# Altium PCB pcb_furnace.pcbdoc
Units mil, origin at the board's own origin, x right, y up, seen from the top; angles counter-clockwise.
Board outline 5155 x 3594.85 mil, 2 copper layers (Top Layer, Bottom Layer); 38 components, 44 nets, 187 pads, 409 vias.
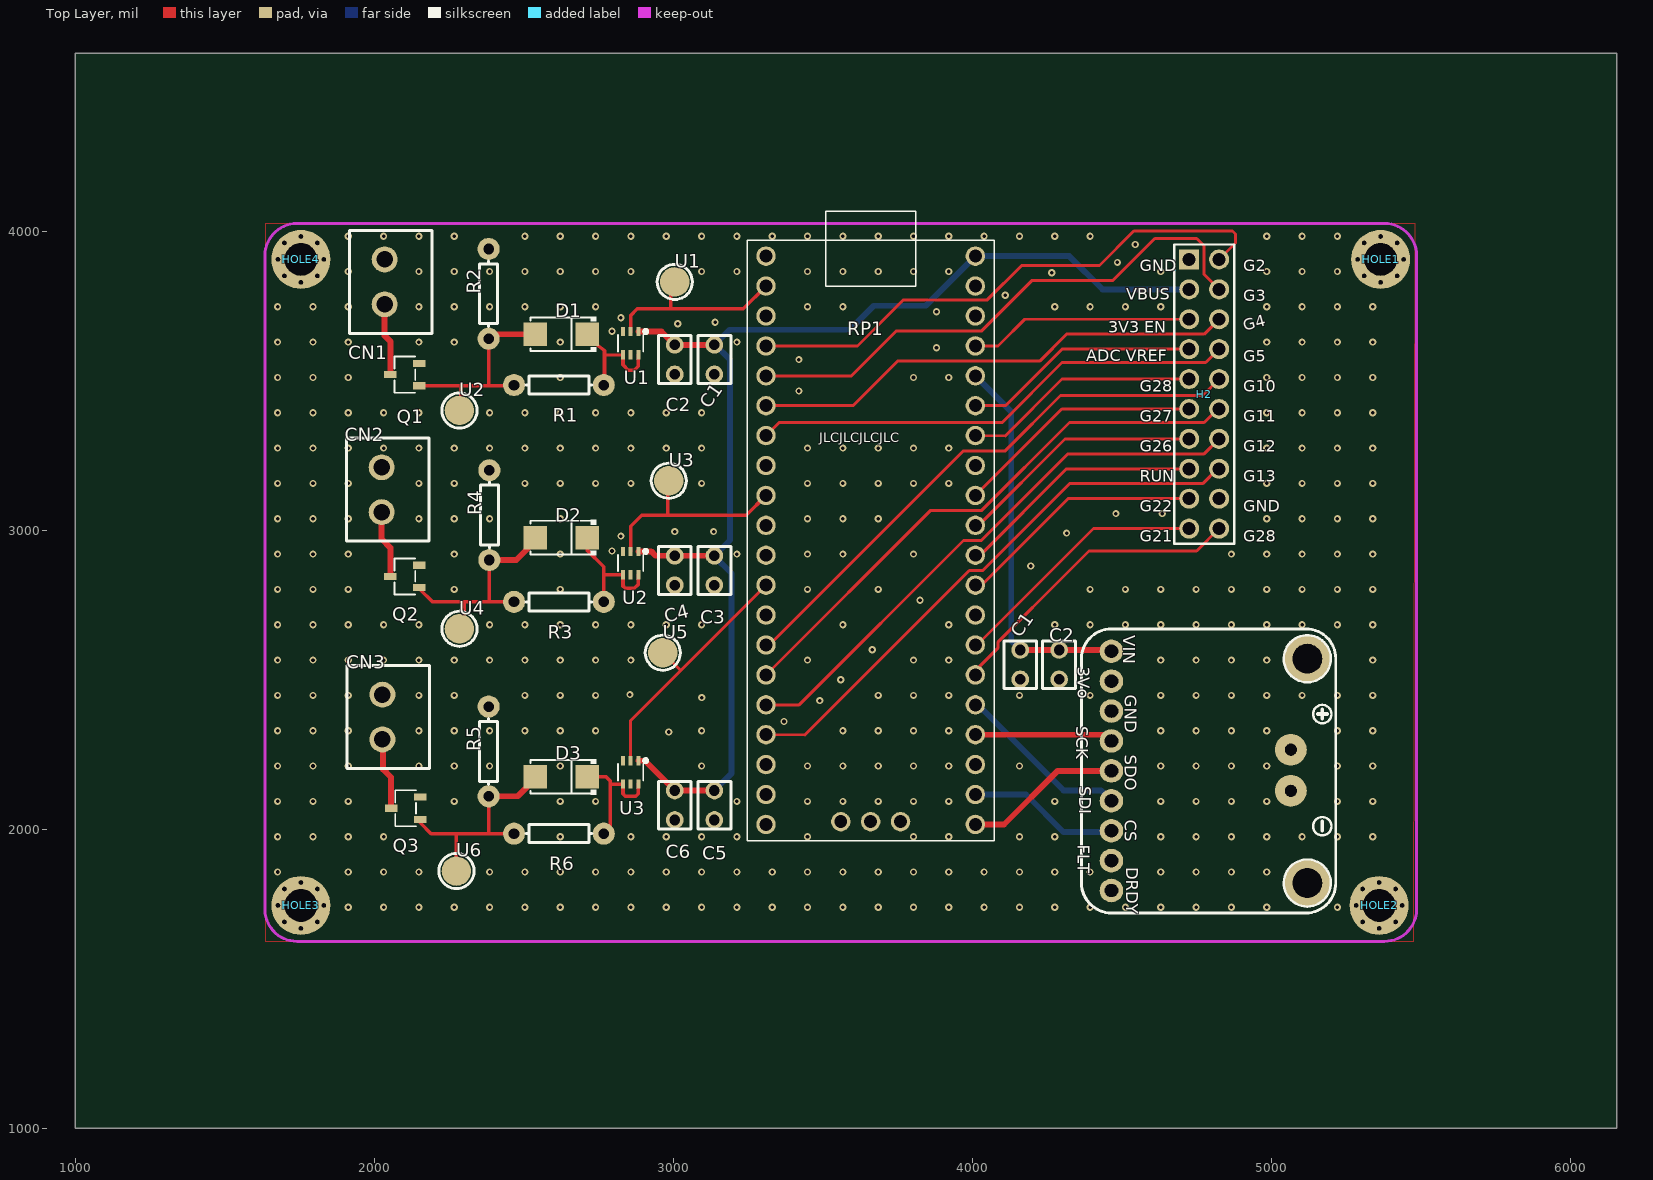
[diagram p0: Top Layer view]
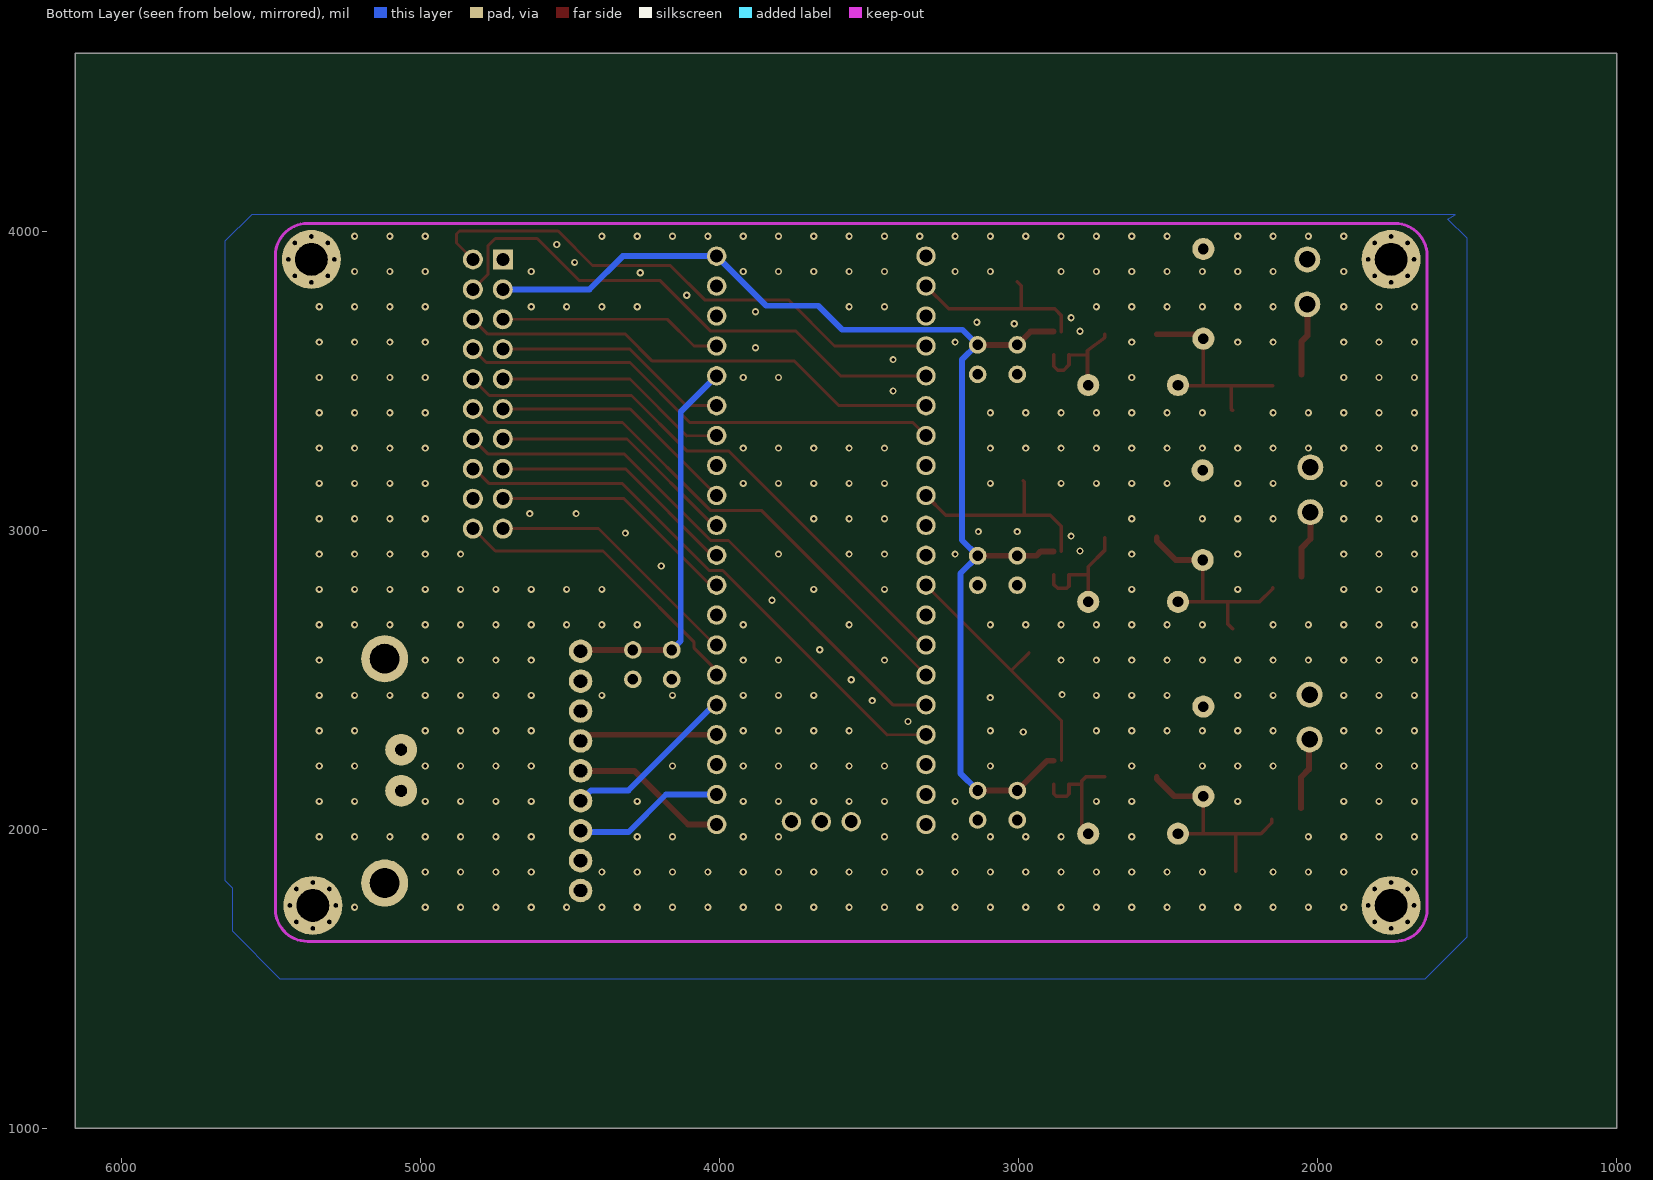
[diagram p1: Bottom Layer view, seen from below]

## Layer stack, top to bottom
Top Layer: signal copper (thickness not stored)
Dielectric: dielectric 12.6, FR-4, Dk 4.8
Bottom Layer: signal copper (thickness not stored)

## Board outline
6155,1000 1000,1000 1000,4594.85 6155,4594.85

## Components (designator, comment, footprint, x,y, rotation, side; value= is the part's Value field where it differs from the comment)
C1 "100n" CAP-TH_L3.6-W2.3-P2.5-D0.6 4160,2550 r90 top
C1 "10u" CAP-TH_L3.6-W2.3-P2.5-D0.6 3137.5,3570 r90 top
C2 "10u" CAP-TH_L3.6-W2.3-P2.5-D0.6 4290,2550 r90 top
C2 "100n" CAP-TH_L3.6-W2.3-P2.5-D0.6 3005,3570 r90 top
C3 "10u" CAP-TH_L3.6-W2.3-P2.5-D0.6 3137.5,2865 r90 top
C4 "100n" CAP-TH_L3.6-W2.3-P2.5-D0.6 3005,2865 r90 top
C5 "10u" CAP-TH_L3.6-W2.3-P2.5-D0.6 3137.5,2080 r90 top
C6 "100n" CAP-TH_L3.6-W2.3-P2.5-D0.6 3005,2080 r90 top
CN1 "XY2500V-E-3.81-2P" CONN-TH_XY2500V-E-3.81-2P 2035,3830 r270 top
CN2 "XY2500V-E-3.81-2P" CONN-TH_XY2500V-E-3.81-2P 2025,3135 r270 top
CN3 "XY2500V-E-3.81-2P" CONN-TH_XY2500V-E-3.81-2P 2027.5,2375 r270 top
D1 "SS14_C2891710" SMA_L4.3-W2.6-LS5.2-RD 2625,3655 r180 top
D2 "SS14_C2891710" SMA_L4.3-W2.6-LS5.2-RD 2625,2975 r180 top
D3 "SS14_C2891710" SMA_L4.3-W2.6-LS5.2-RD 2625,2175 r180 top
H2 "HDR-TH_20P-P2.54-V-M-R2-C10-S2.54" HDR-TH_20P-P2.54-V-M-R2-C10-S2.54 4775,3455 r270 top
HOLE1 "M2.5-HOLE" M2.5-HOLE 5365,3905 r0 top
HOLE2 "M2.5-HOLE" M2.5-HOLE 5360,1745 r0 top
HOLE3 "M2.5-HOLE" M2.5-HOLE 1755,1745 r0 top
HOLE4 "M2.5-HOLE" M2.5-HOLE 1755,3905 r0 top
Q1 "AO3400-SOT23-3L" SOT-23-3_L2.9-W1.6-P1.90-LS2.8-BR 2102.5,3520 r0 top
Q2 "AO3400-SOT23-3L" SOT-23-3_L2.9-W1.6-P1.90-LS2.8-BR 2102.5,2845 r0 top
Q3 "AO3400-SOT23-3L" SOT-23-3_L2.9-W1.6-P1.90-LS2.8-BR 2105,2070 r0 top
R1 "1k" R_AXIAL-0.3 2617.5,3485 r0 top
R2 "1k" R_AXIAL-0.3 2382.5,3790 r90 top
R3 "1k" R_AXIAL-0.3 2617.5,2760 r0 top
R4 "1k" R_AXIAL-0.3 2385,3050 r90 top
R5 "1k" R_AXIAL-0.3 2382.5,2260 r90 top
R6 "1k" R_AXIAL-0.3 2617.5,1985 r0 top
RP1 "RASPBERRY-PI-PICO-THT" RASPBERRY-PI-PICO-THT 3660,2925 r0 top
U1 "ZXGD3009DYTA" SOT-363_L2.0-W1.3-P0.65-LS2.1-BL 2857.5,3625 r180 top
U1 "ZXS-0062A2" TESTPOINT-SMD_ZXS-0062A2 3005,3830 r0 top
U2 "ZXGD3009DYTA" SOT-363_L2.0-W1.3-P0.65-LS2.1-BL 2857.5,2890 r180 top
U2 "ZXS-0062A2" TESTPOINT-SMD_ZXS-0062A2 2285,3400 r0 top
U3 "ZXGD3009DYTA" SOT-363_L2.0-W1.3-P0.65-LS2.1-BL 2857.5,2190 r180 top
U3 "ZXS-0062A2" TESTPOINT-SMD_ZXS-0062A2 2985,3165 r0 top
U4 "ZXS-0062A2" TESTPOINT-SMD_ZXS-0062A2 2285,2670 r0 top
U5 "ZXS-0062A2" TESTPOINT-SMD_ZXS-0062A2 2965,2590 r0 top
U6 "ZXS-0062A2" TESTPOINT-SMD_ZXS-0062A2 2275,1860 r0 top

## Footprints (in the part's own frame and the unit in brackets; to place one, negate y for a bottom-side part, rotate by r counter-clockwise, add the part's x,y. Pads: shape width x height; smd on the part's side, far side on the other; paste and mask are expansions set on the pad)
CAP-TH_L3.6-W2.3-P2.5-D0.6 [mm]
  round 1.5 hole 0.9 paste+0 mask+0.05: 1(-1.25,0) 2(1.25,0)
  silkscreen extent -2.03,-1.4 2.03,1.4
CONN-TH_XY2500V-E-3.81-2P [mm]
  round 2.2 hole 1.4 paste+0 mask+0.051: 1(-1.905,0) 2(1.905,0)
  silkscreen extent -4.37,-3 4.38,4
HDR-TH_20P-P2.54-V-M-R2-C10-S2.54 [mm]
  rect 1.7x1.7 hole 1.1 paste+0 mask+0.051: 1(-11.43,-1.27)
  round 1.7 hole 1.1 paste+0 mask+0.051: 2(-11.43,1.27) 3(-8.89,-1.27) 4(-8.89,1.27) 5(-6.35,-1.27) 6(-6.35,1.27) 7(-3.81,-1.27) 8(-3.81,1.27) 9(-1.27,-1.27) 10(-1.27,1.27) 11(1.27,-1.27) 12(1.27,1.27) 13(3.81,-1.27) 14(3.81,1.27) 15(6.35,-1.27) 16(6.35,1.27) 17(8.89,-1.27) 18(8.89,1.27) 19(11.43,-1.27) 20(11.43,1.27)
  silkscreen extent -12.7,-2.54 12.7,2.54
M2.5-HOLE [mm]
  round 5 hole 2.75 paste+0 mask+0.051: P$1(0,0)
  round 0.655 hole 0.35 slot 0.355 at 0 deg unplated paste+0 mask+0.051: P$2(0,1.95) P$3(0,-1.95) P$4(-1.95,0) P$5(1.95,0) P$6(1.4,1.4) P$7(-1.4,1.4) P$8(-1.4,-1.4) P$9(1.4,-1.4)
R_AXIAL-0.3 [mil]
  round 74 hole 35.4 paste+0 mask+2: 1(-150,0) 2(150,0)
  silkscreen extent -110,-30 110,30
RASPBERRY-PI-PICO-THT [mm]
  round 1.65 hole 1.1 paste+0 mask+0.051: 3V3(OUT)(8.89,15.01) 3V3_EN(8.89,17.55) ADC_VREF(8.89,12.47) GND(-8.89,20.09) GND1(-8.89,7.39) GND2(-8.89,-5.31) GND3(-8.89,-18.01) GND4(8.89,20.09) GND5(8.89,7.39) GND6(8.89,-5.31) GND7(8.89,-18.01) GND8(0,-22.86) GP0(-8.89,25.17) GP1(-8.89,22.63) GP2(-8.89,17.55) GP3(-8.89,15.01) GP4(-8.89,12.47) GP5(-8.89,9.93) GP6(-8.89,4.85) GP7(-8.89,2.31) GP8(-8.89,-0.23) GP9(-8.89,-2.77) GP10(-8.89,-7.85) GP11(-8.89,-10.39) GP12(-8.89,-12.93) GP13(-8.89,-15.47) GP14(-8.89,-20.55) GP15(-8.89,-23.09) GP16(8.89,-23.09) GP17(8.89,-20.55) GP18(8.89,-15.47) GP19(8.89,-12.93) GP20(8.89,-10.39) GP21(8.89,-7.85) GP22(8.89,-2.77) GP26(8.89,2.31) GP27(8.89,4.85) GP28(8.89,9.93) RUN(8.89,-0.23) SWCLK(-2.54,-22.86) SWDIO(2.54,-22.86) VBUS(8.89,25.17) VSYS(8.89,22.63)
  silkscreen extent -10.5,-24.46 10.5,28.98
SMA_L4.3-W2.6-LS5.2-RD [mm]
  rect 2x2 smd paste+0 mask+0.051: 1(-2.2,0) 2(2.2,0)
  silkscreen extent -2.98,-1.5 2.6,1.5
SOT-23-3_L2.9-W1.6-P1.90-LS2.8-BR [mm]
  rect 1.07x0.6 smd paste+0 mask+0.051: 1(1.235,-0.95) 2(1.235,0.95) 3(-1.235,0)
  silkscreen extent -0.88,-1.54 0.88,1.54
SOT-363_L2.0-W1.3-P0.65-LS2.1-BL [mm]
  rect 0.35x0.78 smd paste+0 mask+0.051: 1(-0.65,-0.99) 2(0,-0.99) 3(0.65,-0.99) 4(0.65,0.99) 5(0,0.99) 6(-0.65,0.99)
  silkscreen extent -1.43,-1.14 1.08,0.7
TESTPOINT-SMD_ZXS-0062A2 [mm]
  round 2.5 smd paste+0 mask+0.05: 1(0,0)
  silkscreen extent -1.49,-1.49 1.49,1.49

## Free pads (board coordinates)
  round 78.74 hole 43.31 slot 45.47 at 0 deg paste+0 mask+4: 1(4465,2595) 2(4465,2495) 3(4465,2395) 4(4465,2295) 5(4465,2195) 6(4465,2095) 7(4465,1995) 8(4465,1895) 9(4465,1795)
  round 106.3 hole 39.36 paste+0 mask+4: 10(5065,2265.87) 11(5065,2128.07)
  round 157.48 hole 98.42 slot 98.62 at 90 deg paste+0 mask+4: P$1(5120,1820) P$1(5120,2570)
  round 98.43 hole 98.43 unplated paste+0: ""(5120,1820) ""(5120,2570)

## Via types
v1: diameter 24.02, hole 12.01, Top Layer to Bottom Layer, tented both sides, 400 vias
v2: diameter 24.41, hole 12.2, Top Layer to Bottom Layer, tented both sides, 9 vias

## Nets (pads, with @x,y where several pads share a name; then routed paths per layer and width w, separated by ;. In a path a pad name is that pad's centre, name@x,y a point inside that pad or via, vN(x,y) a via of type N, cw(c..) or ccw(c..) an arc to the next point about the centre after c; other vN are vias at no path point)
CN4_1: CN2.2 Q2.3 | length 227
  Top Layer w19.68: CN2.2 2025,2970 2053.9,2941.1 Q2.3
CN6_1: CN3.2 Q3.3 | length 242
  Top Layer w19.68: CN3.2 2030,2297.5 2030,2200 2056.38,2173.62 Q3.3
D2_1: D2.1 R3.2 U2.4 U2.6 | length 433.3
  Top Layer w11.81: D2.1 2711.6,2933.4 2767.5,2877.5 R3.2 ; 2767.5,2851 U2.4 2831.9,2813.1 2840,2805 2870,2805 2883.1,2818.1 U2.6
D2_2: D2.2 Q2.1 R3.1 R4.1 U4.1 | length 779
  Top Layer w11.81: Q2.1 2151.1,2803.9 2195,2760 R3.1 ; U4.1 2301.88,2686.88 2301.88,2760 ; 2385,2760 R4.1
  Top Layer w19.68: R4.1 2475,2900 2538.4,2963.4 D2.2 ; R3.1@2455,2760 R3.1
D3_1: D3.1 R6.2 U3.4 U3.6 | length 434.5
  Top Layer w11.81: D3.1 2775,2175 2790,2160 2790,2151 ; R6.2 2790,2007.5 2790,2151 ; U3.6 2883.1,2118.1 2875,2110 2840,2110 2831.9,2118.1 U3.4 2790,2151
D3_2: D3.2 Q3.1 R5.1 R6.1 U6.1 | length 776.9
  Top Layer w11.81: Q3.1 2153.6,2021.4 2190,1985 R6.1 ; U6.1 2275.1,1985 ; 2382.5,1985 R5.1
  Top Layer w19.68: R5.1 2480,2110 2538.4,2168.4 D3.2
GND: C1.1 C2.1 C3.1 C4.1 C5.1 C6.1 CN1.1 CN2.1 CN3.1 H2.1 H2.18 pad.3 Q1.2 Q2.2 Q3.2 R2.2 R4.2 R5.2 RP1.GND RP1.GND1 RP1.GND2 RP1.GND3 RP1.GND4 RP1.GND5 RP1.GND6 RP1.GND7 U1.3 U2.3 U3.3
  other v1: 1913.43,1738.7 2031.54,1738.7 2149.65,1738.7 2267.76,1738.7 2385.87,1738.7 2503.98,1738.7 2622.09,1738.7 2740.2,1738.7 2858.31,1738.7 2976.42,1738.7 3094.53,1738.7 3212.64,1738.7 3330.75,1738.7 3448.86,1738.7 3566.97,1738.7 3685.08,1738.7 3803.19,1738.7 3921.3,1738.7 4039.41,1738.7 4157.52,1738.7 4275.63,1738.7 4393.74,1738.7 4511.85,1738.7 4629.96,1738.7 4748.07,1738.7 4866.18,1738.7 4984.29,1738.7 5220.51,1738.7 1677.21,1856.81 1913.43,1856.81 2031.54,1856.81 2149.65,1856.81 2385.87,1856.81 2503.98,1856.81 2622.09,1856.81 2740.2,1856.81 2858.31,1856.81 2976.42,1856.81 3094.53,1856.81 3212.64,1856.81 3330.75,1856.81 3448.86,1856.81 3566.97,1856.81 3685.08,1856.81 3803.19,1856.81 3921.3,1856.81 4039.41,1856.81 4157.52,1856.81 4275.63,1856.81 4393.74,1856.81 4629.96,1856.81 4748.07,1856.81 4866.18,1856.81 4984.29,1856.81 1677.21,1974.92 1795.32,1974.92 1913.43,1974.92 2031.54,1974.92 2622.09,1974.92 2858.31,1974.92 2976.42,1974.92 3094.53,1974.92 3212.64,1974.92 3448.86,1974.92 3803.19,1974.92 3921.3,1974.92 4157.52,1974.92 4275.63,1974.92 4629.96,1974.92 4748.07,1974.92 4866.18,1974.92 4984.29,1974.92 5102.4,1974.92 5220.51,1974.92 5338.62,1974.92 1677.21,2093.03 1795.32,2093.03 1913.43,2093.03 2267.76,2093.03 2622.09,2093.03 2740.2,2093.03 3212.64,2093.03 3448.86,2093.03 3566.97,2093.03 3685.08,2093.03 3803.19,2093.03 3921.3,2093.03 4275.63,2093.03 4629.96,2093.03 4748.07,2093.03 4866.18,2093.03 4984.29,2093.03 5220.51,2093.03 5338.62,2093.03 1677.21,2211.14 1795.32,2211.14 1913.43,2211.14 2149.65,2211.14 2267.76,2211.14 2385.87,2211.14 2622.09,2211.14 3094.53,2211.14 3448.86,2211.14 3566.97,2211.14 3685.08,2211.14 3803.19,2211.14 3921.3,2211.14 4157.52,2211.14 4629.96,2211.14 4748.07,2211.14 4866.18,2211.14 4984.29,2211.14 5220.51,2211.14 5338.62,2211.14 2985,2325 1677.21,2329.25 1795.32,2329.25 1913.43,2329.25 2149.65,2329.25 2267.76,2329.25 2385.87,2329.25 2503.98,2329.25 2622.09,2329.25 2740.2,2329.25 3094.53,2329.25 3566.97,2329.25 3685.08,2329.25 3803.19,2329.25 3921.3,2329.25 4629.96,2329.25 4748.07,2329.25 4866.18,2329.25 4984.29,2329.25 5220.51,2329.25 5338.62,2329.25 3095,2440 1677.21,2447.36 1795.32,2447.36 1913.43,2447.36 2149.65,2447.36 2267.76,2447.36 2503.98,2447.36 2622.09,2447.36 2740.2,2447.36 3685.08,2447.36 3803.19,2447.36 3921.3,2447.36 4157.52,2447.36 4393.74,2447.36 4629.96,2447.36 4748.07,2447.36 4866.18,2447.36 4984.29,2447.36 5102.4,2447.36 5220.51,2447.36 5338.62,2447.36 2855,2450 1677.21,2565.47 1795.32,2565.47 1913.43,2565.47 2031.54,2565.47 2149.65,2565.47 2267.76,2565.47 2385.87,2565.47 2503.98,2565.47 2622.09,2565.47 2740.2,2565.47 2858.31,2565.47 3448.86,2565.47 3803.19,2565.47 3921.3,2565.47 4629.96,2565.47 4748.07,2565.47 4866.18,2565.47 4984.29,2565.47 5338.62,2565.47 1677.21,2683.58 1795.32,2683.58 1913.43,2683.58 2031.54,2683.58 2149.65,2683.58 2385.87,2683.58 2503.98,2683.58 2622.09,2683.58 2740.2,2683.58 2858.31,2683.58 2976.42,2683.58 3094.53,2683.58 3566.97,2683.58 3921.3,2683.58 4275.63,2683.58 4393.74,2683.58 4511.85,2683.58 4629.96,2683.58 4748.07,2683.58 4866.18,2683.58 4984.29,2683.58 5102.4,2683.58 5220.51,2683.58 5338.62,2683.58 1677.21,2801.69 1795.32,2801.69 1913.43,2801.69 2267.76,2801.69 2622.09,2801.69 3448.86,2801.69 3685.08,2801.69 4393.74,2801.69 4511.85,2801.69 4629.96,2801.69 4748.07,2801.69 4866.18,2801.69 4984.29,2801.69 5102.4,2801.69 5220.51,2801.69 5338.62,2801.69 4195,2880 1677.21,2919.8 1795.32,2919.8 1913.43,2919.8 2267.76,2919.8 2622.09,2919.8 3212.64,2919.8 3448.86,2919.8 3566.97,2919.8 3803.19,2919.8 4866.18,2919.8 4984.29,2919.8 5102.4,2919.8 5220.51,2919.8 5338.62,2919.8 2795,2930 2825,2980 4315,2990 3005,2995 3135,2995 1677.21,3037.91 1795.32,3037.91 1913.43,3037.91 2149.65,3037.91 2267.76,3037.91 2385.87,3037.91 2622.09,3037.91 3448.86,3037.91 3566.97,3037.91 3685.08,3037.91 4984.29,3037.91 5102.4,3037.91 5220.51,3037.91 5338.62,3037.91 4480,3055 4635,3055 1677.21,3156.02 1795.32,3156.02 1913.43,3156.02 2149.65,3156.02 2267.76,3156.02 2503.98,3156.02 2622.09,3156.02 2740.2,3156.02 2858.31,3156.02 3094.53,3156.02 3448.86,3156.02 3566.97,3156.02 3685.08,3156.02 3803.19,3156.02 3921.3,3156.02 4984.29,3156.02 5102.4,3156.02 5220.51,3156.02 5338.62,3156.02 1677.21,3274.13 1795.32,3274.13 1913.43,3274.13 2031.54,3274.13 2149.65,3274.13 2267.76,3274.13 2385.87,3274.13 2503.98,3274.13 2622.09,3274.13 2740.2,3274.13 2858.31,3274.13 2976.42,3274.13 3094.53,3274.13 3448.86,3274.13 3566.97,3274.13 3685.08,3274.13 3803.19,3274.13 3921.3,3274.13 4984.29,3274.13 5102.4,3274.13 5220.51,3274.13 5338.62,3274.13 1677.21,3392.24 1795.32,3392.24 1913.43,3392.24 2031.54,3392.24 2149.65,3392.24 2385.87,3392.24 2503.98,3392.24 2622.09,3392.24 2740.2,3392.24 2858.31,3392.24 2976.42,3392.24 3094.53,3392.24 4984.29,3392.24 5102.4,3392.24 5220.51,3392.24 5338.62,3392.24 3420,3465 1677.21,3510.35 1795.32,3510.35 1913.43,3510.35 2622.09,3510.35 3803.19,3510.35 3921.3,3510.35 4984.29,3510.35 5102.4,3510.35 5220.51,3510.35 5338.62,3510.35 3420,3570 3880,3610 1677.21,3628.46 1795.32,3628.46 1913.43,3628.46 2149.65,3628.46 2267.76,3628.46 2622.09,3628.46 3212.64,3628.46 4984.29,3628.46 5102.4,3628.46 5220.51,3628.46 5338.62,3628.46 2795,3665 3015,3690 3140,3695 2825,3710 3880,3730 1677.21,3746.57 1795.32,3746.57 1913.43,3746.57 2149.65,3746.57 2267.76,3746.57 2385.87,3746.57 2503.98,3746.57 2622.09,3746.57 2740.2,3746.57 3448.86,3746.57 3566.97,3746.57 4275.63,3746.57 4393.74,3746.57 4511.85,3746.57 4629.96,3746.57 4984.29,3746.57 5102.4,3746.57 5220.51,3746.57 5338.62,3746.57 1913.43,3864.68 2149.65,3864.68 2267.76,3864.68 2385.87,3864.68 2503.98,3864.68 2622.09,3864.68 2740.2,3864.68 2858.31,3864.68 3094.53,3864.68 3212.64,3864.68 3448.86,3864.68 3566.97,3864.68 3685.08,3864.68 3803.19,3864.68 3921.3,3864.68 4629.96,3864.68 4984.29,3864.68 5102.4,3864.68 5220.51,3864.68 1913.43,3982.79 2031.54,3982.79 2149.65,3982.79 2267.76,3982.79 2503.98,3982.79 2622.09,3982.79 2740.2,3982.79 2858.31,3982.79 2976.42,3982.79 3094.53,3982.79 3212.64,3982.79 3330.75,3982.79 3448.86,3982.79 3566.97,3982.79 3685.08,3982.79 3803.19,3982.79 3921.3,3982.79 4039.41,3982.79 4157.52,3982.79 4275.63,3982.79 4393.74,3982.79 4984.29,3982.79 5102.4,3982.79 5220.51,3982.79
  other v2: 3370,2360 3490,2430 3560,2500 3665,2600 3825,2765 4110,3785 4265,3860 4485,3895 4545,3955
Q1_1: D1.2 Q1.1 R1.1 R2.1 U2.1@2285,3400 | length 721.6
  Top Layer w11.81: Q1.1 2465.1,3482.6 R1.1 ; U2.1@2285,3400 2290.03,3405.03 2290.03,3482.6 ; 2382.5,3482.6 R2.1
  Top Layer w19.68: R2.1 2397.5,3655 D1.2
Q1_3: CN1.2 Q1.3 | length 242.8
  Top Layer w19.68: CN1.2 2035,3650 2053.9,3631.1 Q1.3
RP1_3V3(OUT): C1.2@4160,2599.21 C2.2@4290,2599.21 pad.1 RP1.3V3(OUT) | length 1285.6
  Top Layer w19.68: C1.2@4160,2599.21 4290,2599.21 4460.79,2599.21 pad.1
  Bottom Layer w19.68: 4010,3515.94 4130,3395.94 4130,2629.21 C1.2@4160,2599.21
RP1_3V3_EN: H2.5 RP1.3V3_EN | length 751.9
  Top Layer w10: RP1.3V3_EN 4085.9,3615.9 4092.62,3622.62 4175,3705 H2.5
RP1_ADC_VREF: H2.7 RP1.ADC_VREF | length 793.3
  Top Layer w10: RP1.ADC_VREF 4110.9,3415.9 4300,3605 H2.7
RP1_GND8: RP1.GND8
RP1_GP0: RP1.GP0
RP1_GP1: RP1.GP1 U1.1@3005,3830 U1.2 | length 642.3
  Top Layer w11.81: U1.2 2857.5,3717.5 2880,3740 3234.1,3740 RP1.GP1 ; 2991.66,3740 2991.66,3816.66 U1.1@3005,3830
RP1_GP2: H2.2 RP1.GP2 | length 1841
  Top Layer w10: RP1.GP2 3615.9,3615.9 3770,3770 4050,3770 4165,3885 4425,3885 4540,4000 4870,4000 4880,3990 4880,3960 H2.2
RP1_GP3: H2.4 RP1.GP3 | length 1831.2
  Top Layer w10: RP1.GP3 3595.94,3515.94 3745,3665 4030,3665 4200,3835 4470,3835 4595,3960 4610,3975 4750,3975 4775,3950 4775,3855 H2.4
RP1_GP4: H2.6 RP1.GP4 | length 1634.8
  Top Layer w10: RP1.GP4 3600.9,3415.9 3750,3565 4225,3565 4315,3655 4775,3655 4793.5,3673.5 H2.6
RP1_GP5: H2.8 RP1.GP5 | length 1634.7
  Top Layer w10: RP1.GP5 3354.06,3360 4100,3360 4300,3560 4780,3560 H2.8
RP1_GP6: RP1.GP6 U2.2 U3.1@2985,3165 | length 695.2
  Top Layer w11.81: U2.2 2857.5,3012.5 2895,3050 3244.1,3050 RP1.GP6 ; 2981.66,3050 2981.66,3161.66 U3.1@2985,3165
RP1_GP7: RP1.GP7
RP1_GP8: RP1.GP8
RP1_GP9: RP1.GP9 U3.2 U5.1 | length 858.6
  Top Layer w10: U3.2 2857.5,2363.4 RP1.GP9 ; U5.1 3025,2530.9
RP1_GP10: H2.10 RP1.GP10 | length 1883.3
  Top Layer w10: RP1.GP10 3320.9,2615.9 3970,3265 4110,3265 4295,3450 4770,3450 H2.10
RP1_GP11: H2.12 RP1.GP11 | length 1883.3
  Top Layer w10: RP1.GP11 3859.1,3065 4030,3065 4325,3360 4775,3360 4820,3405 H2.12
RP1_GP12: H2.14 RP1.GP12 | length 1883.3
  Top Layer w10: RP1.GP12 3420.9,2415.9 3970,2965 4030,2965 4320,3255 4775,3255 H2.14
RP1_GP13: H2.16 RP1.GP13 | length 1883.7
  Top Layer w10: RP1.GP13 3440,2315 3990,2865 4035,2865 4325,3155 4770,3155 4820,3205 H2.16
RP1_GP14: RP1.GP14
RP1_GP15: RP1.GP15
RP1_GP16: pad.5 RP1.GP16 | length 529.2
  Top Layer w19.68: RP1.GP16 4105.94,2015.94 4285,2195 pad.5
RP1_GP17: pad.7 RP1.GP17 | length 509.2
  Bottom Layer w19.68: RP1.GP17 4179.06,2115.94 4305,1990 4460,1990 pad.7
RP1_GP18: pad.4 RP1.GP18 | length 463.7
  Top Layer w19.68: RP1.GP18 4444.06,2315.94 pad.4
RP1_GP19: pad.6 RP1.GP19 | length 587.9
  Bottom Layer w19.68: RP1.GP19 4019.06,2415.94 4305,2130 4430,2130 pad.6
RP1_GP20: H2.20 RP1.GP20 | length 1037.6
  Top Layer w10: RP1.GP20 4010,2530 4085,2605 4085,2625 4321.41,2861.41 4390,2930 4750,2930 H2.20
RP1_GP21: H2.19 RP1.GP21 | length 876.2
  Top Layer w10: RP1.GP21 4015.9,2615.9 4405,3005 H2.19
RP1_GP22: H2.17 RP1.GP22 | length 834.7
  Top Layer w10: RP1.GP22 4030.94,2815.94 4320,3105 H2.17
RP1_GP26: H2.13 RP1.GP26 | length 834.7
  Top Layer w10: RP1.GP26 4020.94,3015.94 4310,3305 H2.13
RP1_GP27: H2.11 RP1.GP27 | length 834.7
  Top Layer w10: RP1.GP27 4299.1,3405 H2.11
RP1_GP28: H2.9 RP1.GP28 | length 793.7
  Top Layer w10: RP1.GP28 4110,3315 4300,3505 H2.9
RP1_RUN: H2.15 RP1.RUN | length 834.7
  Top Layer w10: RP1.RUN 4025.94,2915.94 4315,3205 H2.15
RP1_SWCLK: RP1.SWCLK
RP1_SWDIO: RP1.SWDIO
RP1_VBUS: C1.2@3137.5,3619.21 C2.2@3005,3619.21 C3.2 C4.2 C5.2 C6.2 H2.3 RP1.VBUS U1.1@2883.09,3663.98 U2.1@2883.09,2928.98 U3.1@2883.09,2228.98 | length 4168.6
  Top Layer w19.68: U3.1@2883.1,2229 2905.2,2229 C6.2 C5.2 ; U2.1@2883.09,2928.98 2926.02,2928.98 2940.79,2914.21 C4.2 C3.2 ; U1.1@2883.1,3664 2960.2,3664 3005,3619.2 C1.2@3137.5,3619.21
  Bottom Layer w19.68: C5.2 3195,2186.71 3195,2855 3137.5,2912.5 C3.2 3190,2966.71 3190,3570 3140.79,3619.21 3137.5,3619.21 3188.29,3670 3590,3670 3670,3750 3844.06,3750 RP1.VBUS 4324.06,3915.94 4435,3805 H2.3
U1_4: D1.1 R1.2 U1.4 U1.6 | length 396.8
  Top Layer w11.81: D1.1 2711.6,3644.4 2770,3600 2770,3585 ; R1.2 2770,3487.5 2770,3585 ; U1.6 2883.1,3548.1 2870,3535 2850,3535 2831.9,3553.1 U1.4 2770,3585
pads on no net: HOLE1.P$1 HOLE1.P$2 HOLE1.P$3 HOLE1.P$4 HOLE1.P$5 HOLE1.P$6 HOLE1.P$7 HOLE1.P$8 HOLE1.P$9 HOLE2.P$1 HOLE2.P$2 HOLE2.P$3 HOLE2.P$4 HOLE2.P$5 HOLE2.P$6 HOLE2.P$7 HOLE2.P$8 HOLE2.P$9 HOLE3.P$1 HOLE3.P$2 HOLE3.P$3 HOLE3.P$4 HOLE3.P$5 HOLE3.P$6 HOLE3.P$7 HOLE3.P$8 HOLE3.P$9 HOLE4.P$1 HOLE4.P$2 HOLE4.P$3 HOLE4.P$4 HOLE4.P$5 HOLE4.P$6 HOLE4.P$7 HOLE4.P$8 HOLE4.P$9 RP1.VSYS U1.5 U2.5 U3.5

## Polygon pours and split planes (outlines as drawn)
GND on Bottom Layer (solid): 1540,4055 5565,4055 5655,3965 5655,1830 5630,1805 5630,1660 5470,1500 1640,1500 1500,1640 1500,3975 1565,4040
GND on Top Layer (solid): 1635,1625 5475,1625 5480,4025 1635,4025 1635,4020

## Keep-outs
Keep-Out Layer:
  lines w10: 1635,1731.29 ccw(c1741.3,1731.29) 1741.3,1624.99 ; 1635,3918.69 cw(c1741.3,3918.69) 1741.3,4024.99 ; 5378.69,1624.99 ccw(c5378.69,1731.29) 5484.99,1731.29 ; 5378.69,4024.99 cw(c5378.69,3918.69) 5484.99,3918.69

## Silkscreen, mask and mechanical layers (free items; w line width, h text height)
Top Overlay:
  lines w8: 5119.81,1741.26 cw(c5119.9,1820) 5120,1741.26 ; 5119.81,2491.26 cw(c5119.9,2570) 5120,2491.26 ; 5169.84,1979.23 cw(c5169.92,2010.01) 5170,1979.23 ; 5169.84,2354.23 cw(c5169.92,2385.01) 5170,2354.23
  lines w10: 4365,1820 4365,2570 cw(c4465,2570) 4465,2670 5115,2670 cw(c5115,2570) 5215,2570 5215,1820 cw(c5115,1820) 5115,1720 4465,1720 cw(c4465,1820) 4365,1820
  lines w12: 5154.38,2385 5185.62,2385 ; 5170,1994.38 5170,2025.63 ; 5170,2369.38 5170,2400.63
  text "GND" at 4560,3865.32 h39.37
  text "G2" at 4905,3865.32 h39.37
  text "VBUS" at 4515,3770.32 h39.37
  text "G3" at 4905,3764.76 h39.37
  text "G4" at 4910.09,3664.88 h39.37 r15
  text "3V3 EN" at 4455,3660.32 h39.37
  text "ADC VREF" at 4380,3565.32 h39.37
  text "G5" at 4905,3563.64 h39.37
  text "G28" at 4560,3463.09 h39.37
  text "G10" at 4905,3463.09 h39.37
  text "G27" at 4560,3362.53 h39.37
  text "G11" at 4905,3362.53 h39.37
  text "JLCJLCJLCJLC" at 3488.38,3293.31 h31.5
  text "G26" at 4560,3261.99 h39.37
  text "G12" at 4905,3261.99 h39.37
  text "RUN" at 4560,3161.43 h39.37
  text "G13" at 4905,3161.43 h39.37
  text "G22" at 4560,3060.88 h39.37
  text "GND" at 4905,3060.88 h39.37
  text "G21" at 4560,2960.32 h39.37
  text "G28" at 4905,2960.32 h39.37
  text "VIN" at 4505,2649 h40 r270
  text "3Vo" at 4351.81,2543.65 h40 r270
  text "GND" at 4510,2449 h40 r270
  text "SCK" at 4346.81,2343.65 h40 r270
  text "SDO" at 4510,2249 h40 r270
  text "SDI" at 4356.81,2143.65 h40 r270
  text "CS" at 4510,2031 h40 r270
  text "FLT" at 4351.81,1948.65 h40 r270
  text "DRDY" at 4515,1872 h40 r270
Document:
  region: 4475,2585 4475,2605 4455,2605 4455,2585
  region: 4475,1785 4475,1805 4455,1805 4455,1785
  region: 4475,1885 4475,1905 4455,1905 4455,1885
  region: 4475,1985 4475,2005 4455,2005 4455,1985
  region: 4475,2085 4475,2105 4455,2105 4455,2085
  region: 4475,2185 4475,2205 4455,2205 4455,2185
  region: 4475,2285 4475,2305 4455,2305 4455,2285
  region: 4475,2385 4475,2405 4455,2405 4455,2385
  region: 4475,2485 4475,2505 4455,2505 4455,2485
  lines w80: 5119.79,1780.63 cw(c5119.9,1820) 5120,1780.63 ; 5119.79,1780.63 cw(c5119.9,1820) 5120,1780.63 ; 5119.79,1780.63 cw(c5119.9,1820) 5120,1780.63 ; 5119.79,1780.63 cw(c5119.9,1820) 5120,1780.63 ; 5119.79,2530.63 cw(c5119.9,2570) 5120,2530.63 ; 5119.79,2530.63 cw(c5119.9,2570) 5120,2530.63 ; 5119.79,2530.63 cw(c5119.9,2570) 5120,2530.63 ; 5119.79,2530.63 cw(c5119.9,2570) 5120,2530.63